# Altium PCB MAX232Breakout.PcbDoc
Units mm, origin at the board's own origin, x right, y up, seen from the top; angles counter-clockwise.
Board outline 45.34 x 33.91 mm, 2 copper layers (Top Layer, Bottom Layer); 7 components, 14 nets, 41 pads, 0 vias.
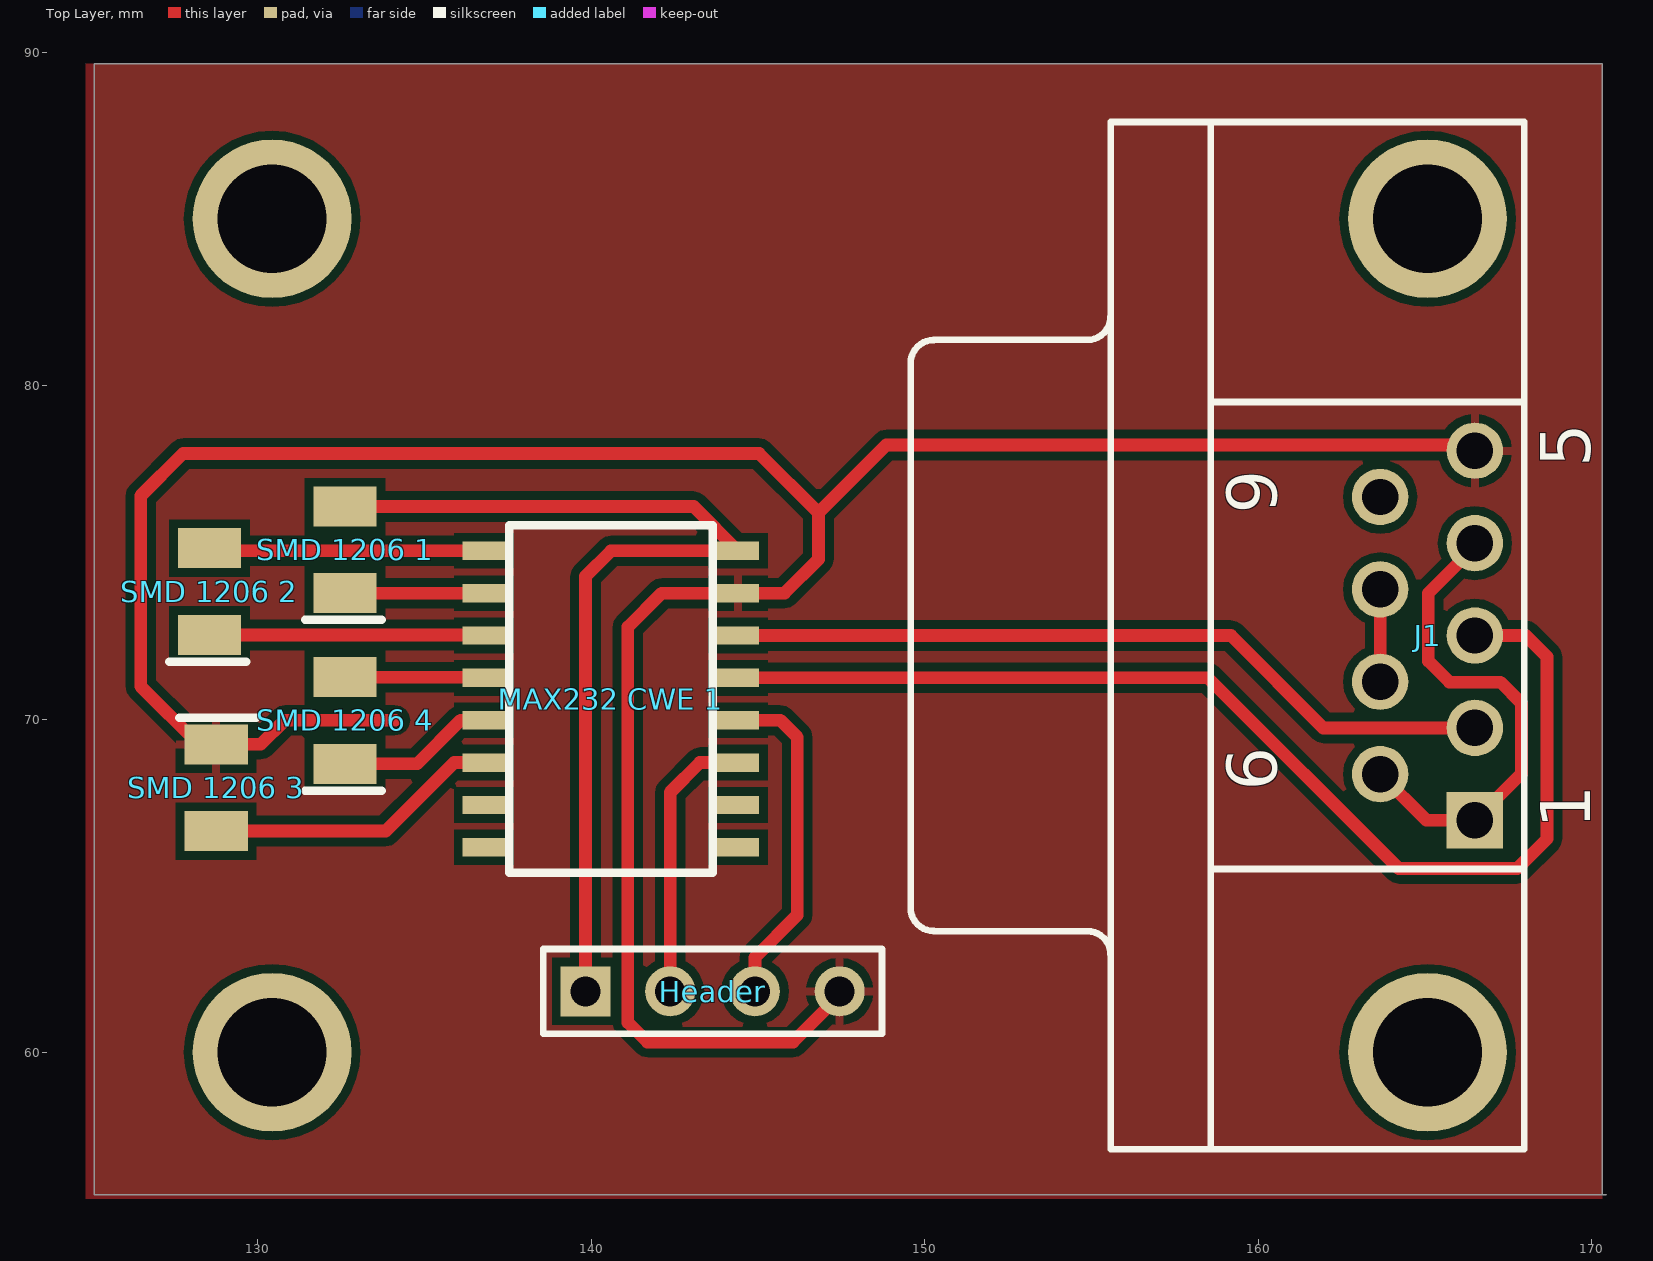
[diagram p0: Top Layer view]
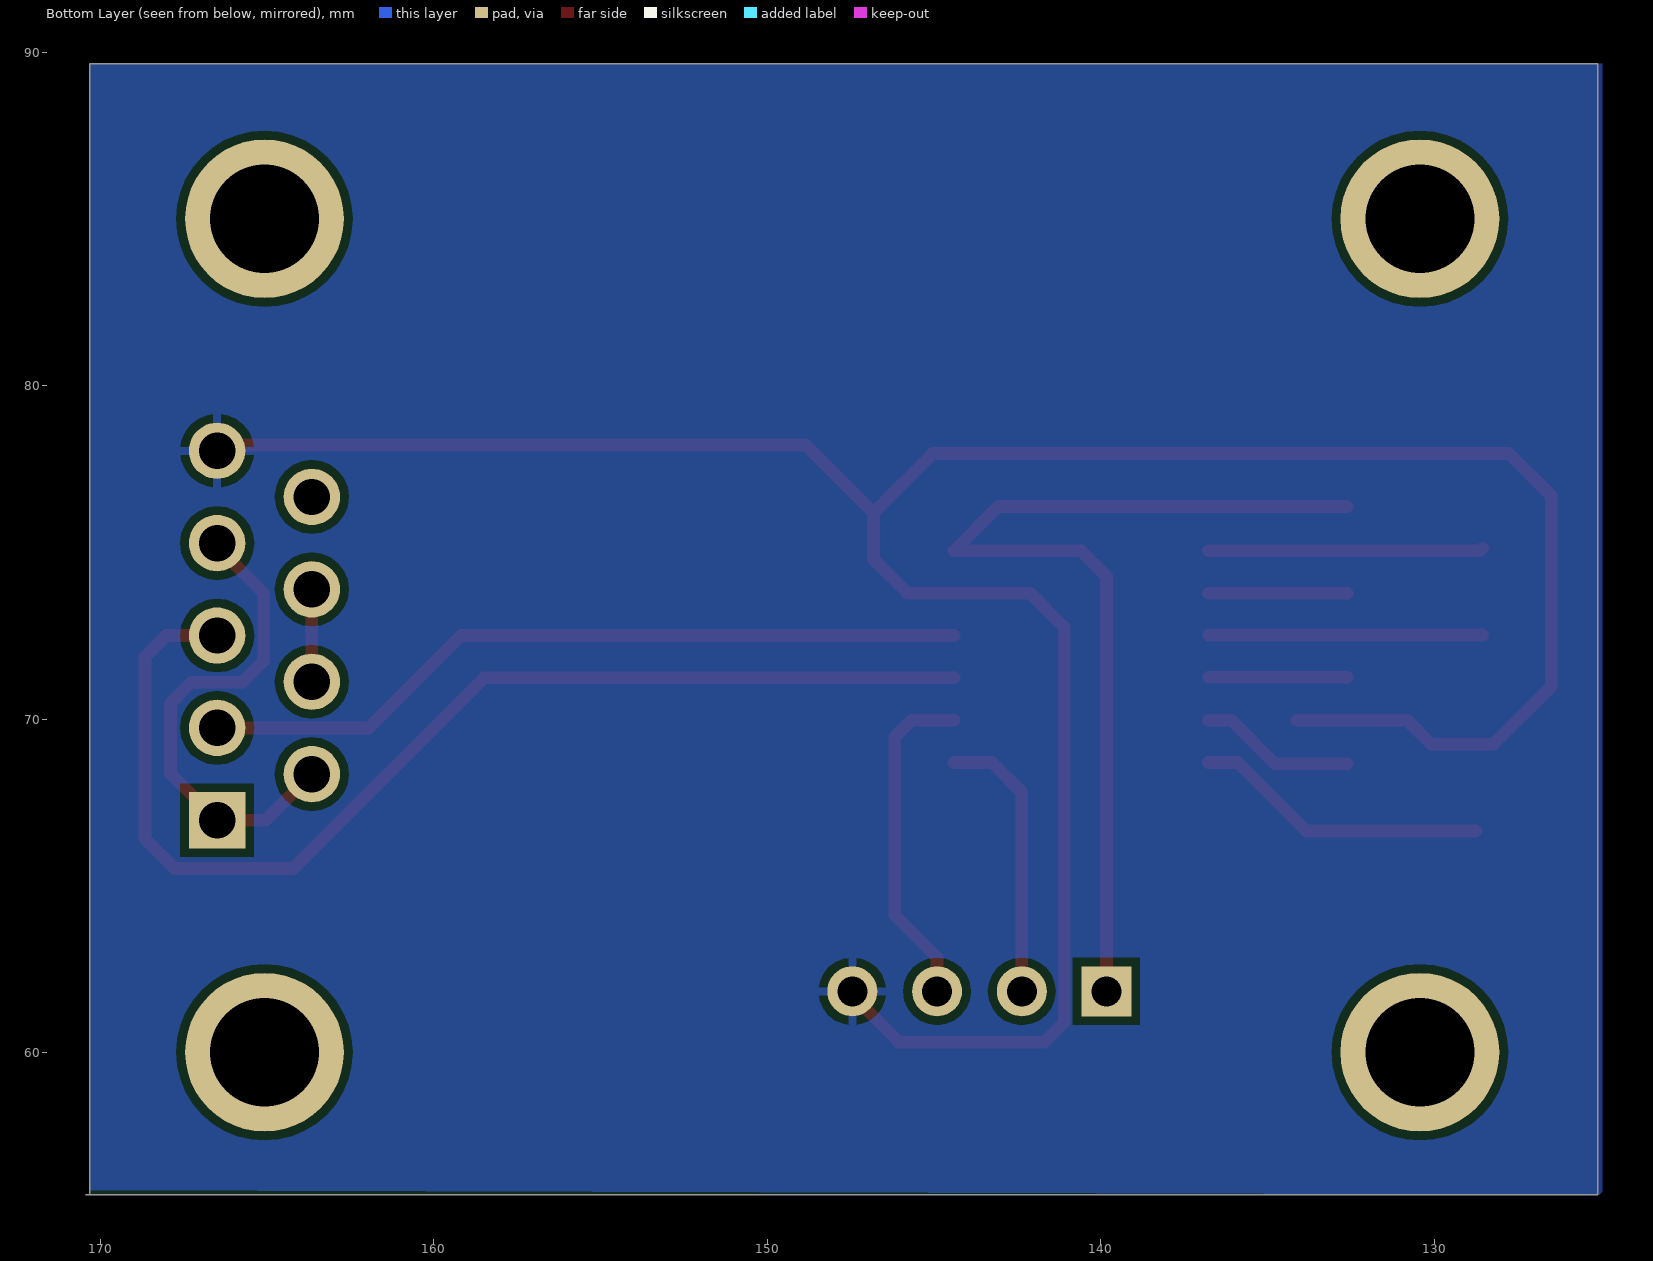
[diagram p1: Bottom Layer view, seen from below]

## Layer stack, top to bottom
Top Layer: signal copper 0.0356
Dielectric: dielectric 0.32, FR-4, Dk 4.8
Bottom Layer: signal copper 0.0356

## Board outline
170.434,55.753 125.095,55.753 125.095,89.662 170.307,89.662 170.307,55.753

## Design rules (kind name [scope] priority, off if disabled: settings)
Clearance [All] p1: gap=0.254
ComponentClearance [All] p1: gap=0.254 collisioncheckmode=0
HoleSize [All] p1: absolutevalues=TRUE maxlimit=5 minlimit=0.025 maxpercent=80.000 minpercent=20.000
PolygonConnect [All] p1: connectstyle=Relief reliefconductorwidth=0.254 reliefentries=4 polygonreliefangle="90 Angle"
RoutingVias [All] p1: holewidth=0.711 width=1.27 viastyle="Through Hole" minholewidth=0.711 minwidth=1.27 maxholewidth=0.711 maxwidth=1.27
SolderMaskExpansion [All] p1: expansion=0.102
TestPointUsage [All] p1: valid=0 allowmultiple=FALSE
Testpoint [All] p1: side=15 testpointundercomponent=TRUE minsize=1.016 maxsize=2.54 preferedsize=1.524 minholesize=0 maxholesize=1.016 preferedholesize=0.813 testpointgrid=0.025 style=1023 order=0123456789
Width [All] p1: maxlimit=0.4 minlimit=0.203 preferedwidth=0.254 toplayer_prefwidth=0.381 minimp=50.000000 maximp=50.000000 favimp=50.000000
16 further rules are at their usual default settings.

## Components (designator, comment, footprint, x,y, rotation, side; value= is the part's Value field where it differs from the comment)
Header "Header 4" HDR1X4 139.827,61.849 r0 top
J1 "D Connector 9" DSUB1.385-2H9 155.575,72.517 r90 top
"MAX232 CWE 1" "MAX232 CWE" "16pin SOIC" 136.779,75.057 r270 top
"SMD 1206 1" "SMD 1206" "SMD 1206" 132.715,74.585 r90 top
"SMD 1206 2" "SMD 1206" "SMD 1206" 128.651,73.335 r90 top
"SMD 1206 3" "SMD 1206" "SMD 1206" 128.651,68.453 r270 top
"SMD 1206 4" "SMD 1206" "SMD 1206" 132.715,69.469 r90 top

## Footprints (in the part's own frame and the unit in brackets; to place one, negate y for a bottom-side part, rotate by r counter-clockwise, add the part's x,y. Pads: shape width x height; smd on the part's side, far side on the other; paste and mask are expansions set on the pad)
"16pin SOIC" [mm] "16pin SOIC"
  rect 0.55x1.27 smd: 1(0,0) 2(1.27,0) 3(2.54,0) 4(3.81,0) 5(5.08,0) 6(6.35,0) 7(7.62,0) 8(8.89,0) 9(8.89,7.62) 10(7.62,7.62) 11(6.35,7.62) 12(5.08,7.62) 13(3.81,7.62) 14(2.54,7.62) 15(1.27,7.62) 16(0,7.62)
  silkscreen extent -0.76,0.76 9.65,6.86
DSUB1.385-2H9 [mm] "Connector; D Subminiature; 9 Position; Right Angle; Pitch 1.385 mm"
  rect 1.69x1.69 hole 1.09: 1(-5.54,-10.92)
  round 1.69 hole 1.09: 2(-2.77,-10.92) 3(0,-10.92) 4(2.77,-10.92) 5(5.54,-10.92) 6(-4.155,-8.08) 7(-1.385,-8.08) 8(1.385,-8.08) 9(4.155,-8.08)
  round 4.76 hole 3.26: 2(12.495,-9.5) 4(-12.495,-9.5)
  silkscreen extent -15.4,-12.4 15.4,6
HDR1X4 [mm] "Connector; Header; 4 Position"
  rect 1.5x1.5 hole 0.9: 1(0,0)
  round 1.5 hole 0.9: 2(2.54,0) 3(5.08,0) 4(7.62,0)
  silkscreen extent -1.27,-1.27 8.89,1.27
"SMD 1206" [mm] "SMD 1206"
  rect 1.2x1.9 smd: 1(-0.8,0.1) 2(1.8,0.1)
  silkscreen extent -1.6,-1 -1.6,1.3

## Part data
Header: "Header, 4-Pin"
J1: "Receptacle Assembly, 9 Position, Right Angle"
"SMD 1206 1" "SMD 1206 2" "SMD 1206 3" "SMD 1206 4": "SMD 1206 Package Type"

## Free pads (board coordinates)
  round 4.76 hole 3.26: 1(130.429,85.012) 3(130.429,60.022)

## Nets (pads, with @x,y where several pads share a name; then routed paths per layer and width w, separated by ;. In a path a pad name is that pad's centre, name@x,y a point inside that pad or via, vN(x,y) a via of type N, cw(c..) or ccw(c..) an arc to the next point about the centre after c; other vN are vias at no path point)
5V: "MAX232 CWE 1.16" "SMD 1206 1.2" Header.1 | length 29.7
  Top Layer w0.381: 132.615,76.385 143.071,76.385 144.399,75.057 140.589,75.057 139.827,74.295 Header.1
GND: "MAX232 CWE 1.15" "SMD 1206 3.1" Header.4 J1.5 | length 83.6
  Top Layer w0.254: Header.4@147.447,61.722 Header.4
  Top Layer w0.381: 134.112,69.977 130.81,69.977 130.086,69.253 128.232,69.253 126.492,70.993 126.492,76.708 127.762,77.978 145.034,77.978 146.812,76.2 ; Header.4@147.447,61.722 146.05,60.325 141.686,60.325 141.097,60.914 141.097,72.771 142.113,73.787 145.796,73.787 146.812,74.803 146.812,76.2 ; J1.5 166.32,78.232 148.844,78.232 146.812,76.2
NetJ1_1: J1.1 J1.4@166.495,75.287 J1.6 | length 14.9
  Top Layer w0.381: J1.6 165.04,66.977 J1.1 167.894,68.376 167.894,70.485 167.259,71.12 165.735,71.12 165.1,71.755 165.1,73.787 166.495,75.182 J1.4@166.495,75.287
NetJ1_7: J1.7 J1.8 | length 2.8
  Top Layer w0.381: J1.7 J1.8
"NetMAX232 CWE 1_1": "MAX232 CWE 1.1" "SMD 1206 2.2" | length 8.3
  Top Layer w0.381: 128.551,75.135 128.629,75.057 136.779,75.057
"NetMAX232 CWE 1_2": "MAX232 CWE 1.2" "SMD 1206 1.1" | length 4.2
  Top Layer w0.381: 132.617,73.787 136.779,73.787
"NetMAX232 CWE 1_3": "MAX232 CWE 1.3" "SMD 1206 2.1" | length 8.2
  Top Layer w0.381: 128.551,72.535 136.761,72.535
"NetMAX232 CWE 1_4": "MAX232 CWE 1.4" "SMD 1206 4.2" | length 4.1
  Top Layer w0.381: 132.615,71.269 136.757,71.269
"NetMAX232 CWE 1_5": "MAX232 CWE 1.5" "SMD 1206 4.1" | length 4.7
  Top Layer w0.381: 132.615,68.669 134.774,68.669 136.082,69.977 136.779,69.977
"NetMAX232 CWE 1_6": "MAX232 CWE 1.6" "SMD 1206 3.2" | length 8.9
  Top Layer w0.381: 128.751,66.653 133.836,66.653 135.89,68.707 136.779,68.707
RS232IN: "MAX232 CWE 1.13" J1.3 | length 34.9
  Top Layer w0.381: 144.399,71.247 158.496,71.247 164.211,65.532 167.767,65.532 168.656,66.421 168.656,71.882 168.021,72.517 J1.3
RS232OUT: "MAX232 CWE 1.14" J1.2@166.495,69.747 | length 23.2
  Top Layer w0.381: 144.399,72.517 159.179,72.517 161.949,69.747 J1.2@166.495,69.747
RX: "MAX232 CWE 1.12" Header.3 | length 10.1
  Top Layer w0.381: 144.399,69.977 145.669,69.977 146.177,69.469 146.177,64.135 144.907,62.865 Header.3
TX: "MAX232 CWE 1.11" Header.2 | length 8.4
  Top Layer w0.381: Header.2 142.367,67.818 143.256,68.707 144.399,68.707
pads on no net: "MAX232 CWE 1.7" "MAX232 CWE 1.8" "MAX232 CWE 1.9" "MAX232 CWE 1.10" J1.2@165.075,85.012 J1.4@165.075,60.022 J1.9

## Polygon pours and split planes (outlines as drawn)
GND on Top Layer (solid, remove dead copper): 170.307,89.662 170.307,55.626 124.841,55.626 124.841,89.662
GND on Bottom Layer (solid, remove dead copper): 170.307,55.88 170.307,89.662 124.968,89.662 124.968,55.753

## Text inside footprints (layer, text, board x,y; h text height)
J1: Top Overlay "6" at 160.55,67.862 h1.5 r90; Top Overlay "9" at 160.55,76.172 h1.5 r90; Top Overlay "5" at 169.95,77.557 h1.5 r90; Top Overlay "1" at 169.95,66.727 h1.5 r90